# Altium PCB radioslave.PcbDoc
Units mil, origin at the board's own origin, x right, y up, seen from the top; angles counter-clockwise.
Board outline 1771.65 x 3937.01 mil, 2 copper layers (Top Layer, Bottom Layer); 44 components, 40 nets, 148 pads, 22 vias.
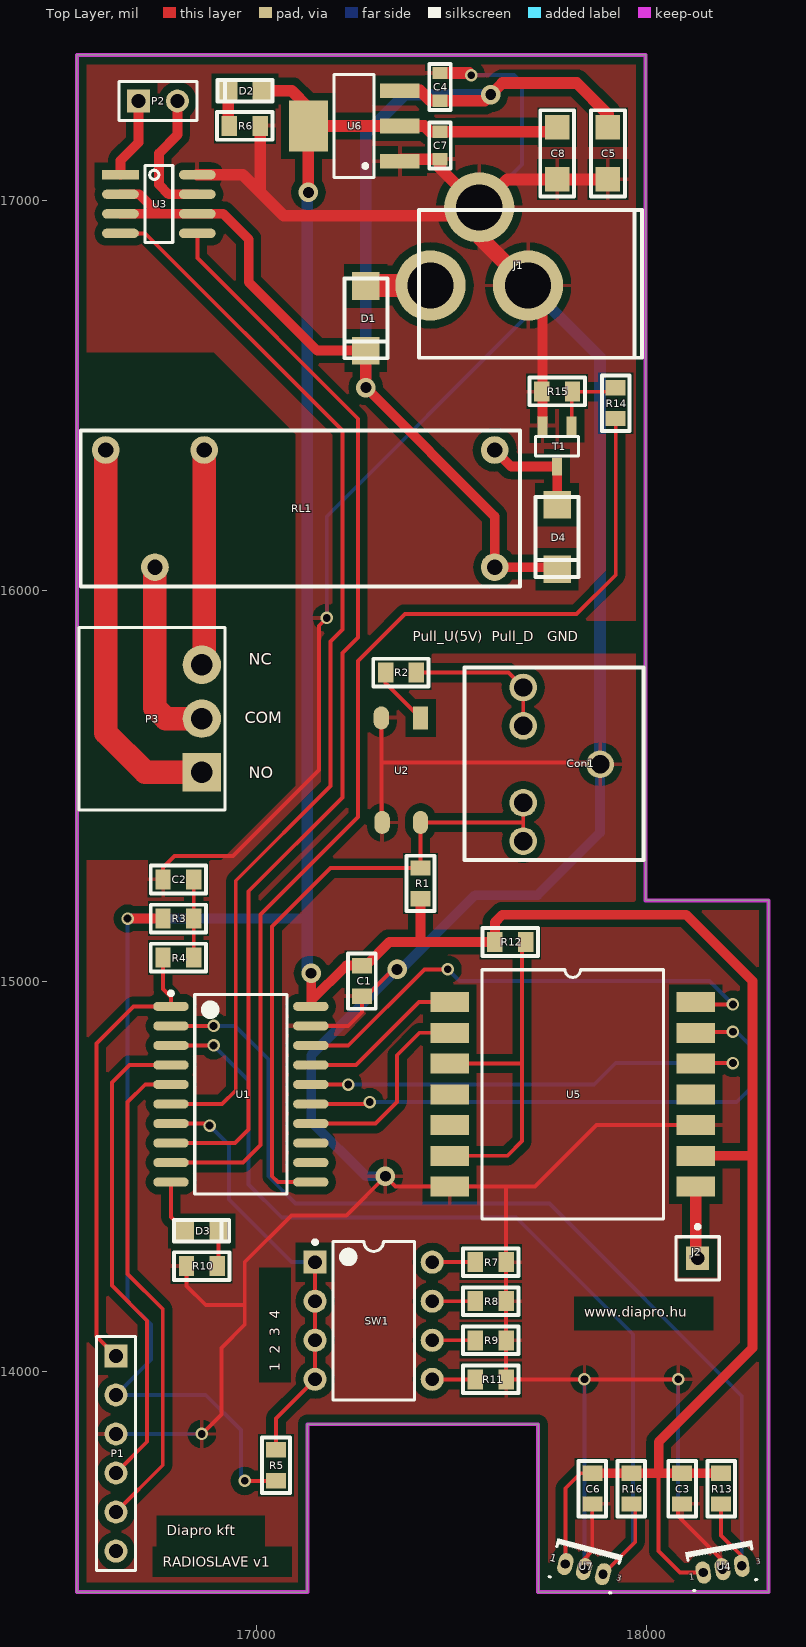
[diagram p0: Top Layer view]
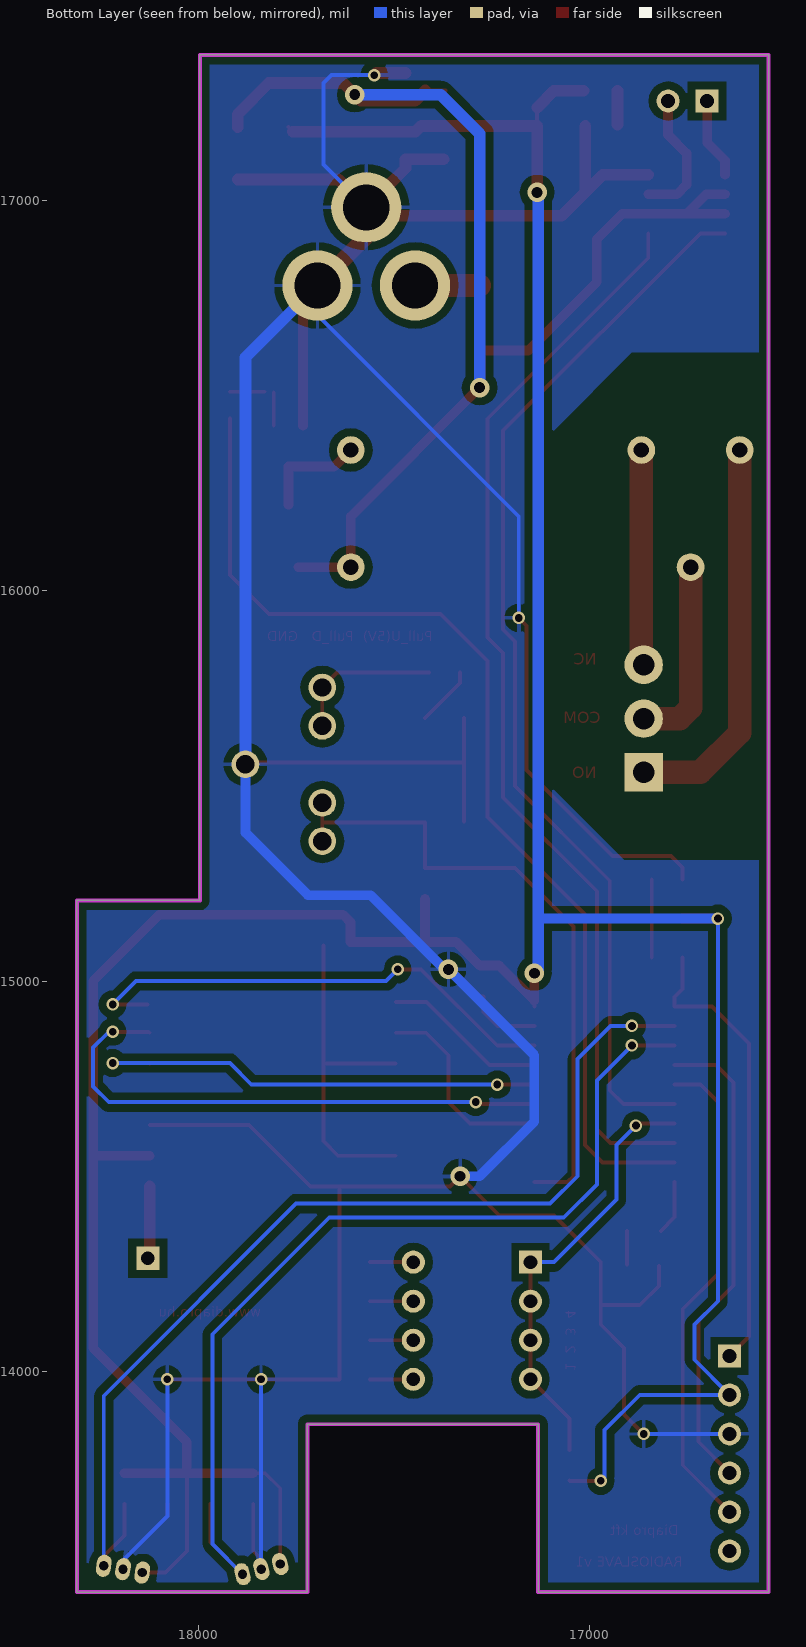
[diagram p1: Bottom Layer view, seen from below]
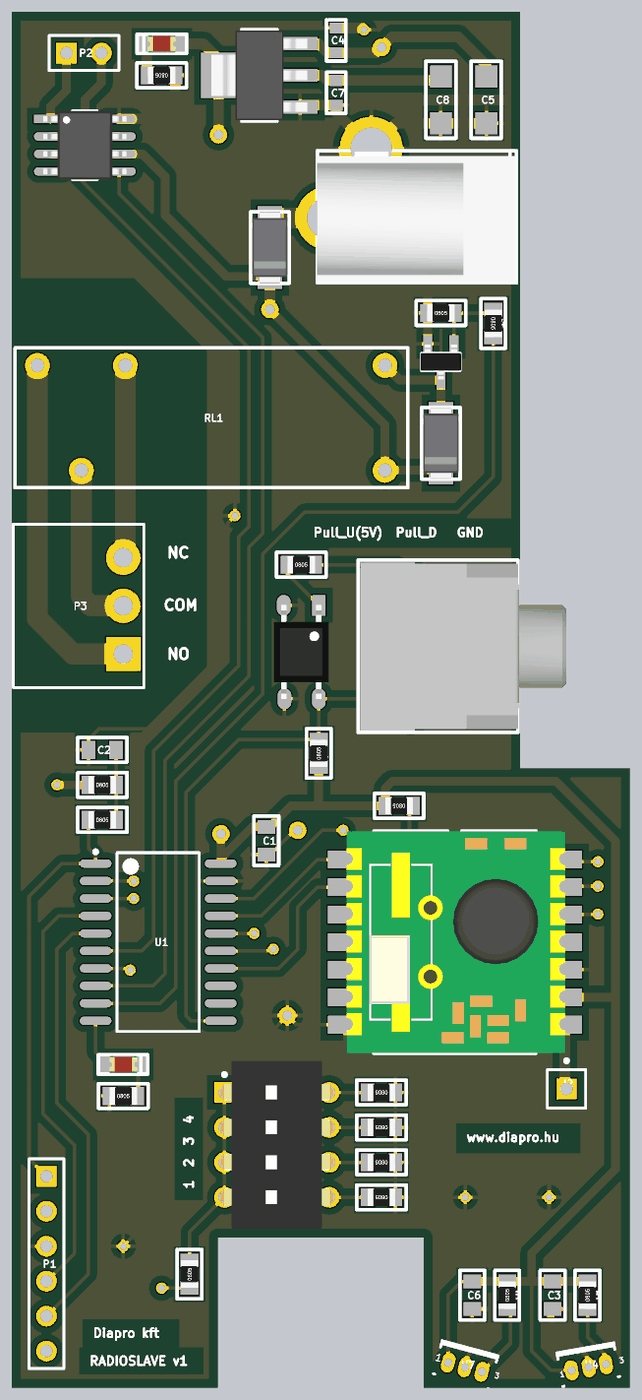
[diagram p2: 3D render of the assembled board from above, using the file's embedded part models]

## Layer stack, top to bottom
Top Layer: signal copper 1.4
Dielectric: dielectric 12.6, FR-4, Dk 4.8
Bottom Layer: signal copper 1.4

## Board outline
16540,13435 16540,17372.01 17996.69,17372.01 17996.69,15206.65 18311.65,15206.65 18311.65,13435 17721.1,13435 17721.1,13865 17130.55,13865 17130.55,13435

## Design rules (kind name [scope] priority, off if disabled: settings)
Clearance Clearance_to_polygon [All vs (InNamedPolygon('Bottom GND'))  or (InNamedPolygon('Top GND'))] p1: gap=20
Clearance [All] p2: gap=15
PolygonConnect [All] p1: connectstyle=Relief reliefconductorwidth=10 reliefentries=4 polygonreliefangle="90 Angle"
RoutingVias [All] p1: holewidth=20 width=32 viastyle="Through Hole" minholewidth=20 minwidth=32 maxholewidth=28 maxwidth=50
SilkToSilkClearance [All] p1: silktosilkclearance=0
SilkscreenOverComponentPads [All] p1: minsilkscreentomaskgap=0
SolderMaskExpansion [All] p1: expansion=4
Width [All] p1: maxlimit=60 minlimit=10 preferedwidth=10
26 further rules are at their usual default settings.

## Components (designator, comment, footprint, x,y, rotation, side; value= is the part's Value field where it differs from the comment)
C1 "100nF" FP_0805_CAP_060 17270,15000 r90 top
C2 "100nF" FP_0805_CAP_060 16800,15260 r0 top
C3 "100nF" FP_0805_CAP_060 18090,13700 r90 top
C4 "100nF" FP_0603_CAP_080 17470,17290 r270 top
C5 "10uF" FP_1206_CAP_085 17900,17120 r270 top
C6 "100nF" FP_0805_CAP_060 17860,13700 r90 top
C7 "100nF" FP_0603_CAP_080 17470,17140 r270 top
C8 "10uF" FP_1206_CAP_085 17770,17120 r90 top
Con1 "Stereo_Jack" STEREO_JACK 17880,15555 r180 top
D1 "DIODE_big" "FP_SMA DO214AC" 17280,16780 r270 top
D2 "LED_RED" FP_0805_LED_RED 17010,17280 r180 top
D3 "LED_GREEN" FP_0805_LED_RED 16820,14360 r0 top
D4 "DIODE_big" "FP_SMA DO214AC" 17770,16220 r270 top
J1 "2.xmm" FP_DC_TAP_ANYA 17445.51,16781.46 r270 top
J2 "ANT" PIN1 18130,14290 r0 top
P1 "Header 6" HDR1X6 16640,14040 r270 top
P2 "Header 2" HDR1X2 16697.48,17253.9 r0 top
P3 "Header 3" "SORKAPOCS 3 P RM3.81" 16860,15810 r270 top
R1 "10k" FP_0805_RES 17420,15250 r90 top
R2 "470R" FP_0805_RES 17370,15790 r0 top
R3 "10K" FP_0805_RES 16800,15160 r0 top
R4 "100R" FP_0805_RES 16800,15060 r0 top
R5 "10k" FP_0805_RES 17050,13760 r90 top
R6 "270R" FP_0805_RES 16970,17190 r180 top
R7 "10k" FP_0805_RES 17600,14280 r180 top
R8 "10k" FP_0805_RES 17600,14180 r180 top
R9 "10k" FP_0805_RES 17600,14080 r180 top
R10 "270R" FP_0805_RES 16860,14270 r0 top
R11 "10k" FP_0805_RES 17600,13980 r180 top
R12 "10k" FP_0805_RES 17650,15100 r180 top
R13 "820R" FP_0805_RES 18190,13700 r90 top
R14 "470R" FP_0805_RES 17920,16480 r270 top
R15 "10k" FP_0805_RES 17770,16510 r0 top
R16 "820R" FP_0805_RES 17960,13700 r90 top
RL1 "S7001E12W" RELAY_MORSE 17610,16360 r180 top
SW1 "DIPSW4" "DIP switch 4 TH" 17300,14130 r0 top
T1 "Si2306" FET_SOT23 17770,16370 r90 top
U1 "PIC24F16KA101-I/SO" SOIC-SO20_N 16960,14710 r0 top
U2 "KB817D-B" SOP-4 17370,15540 r270 top
U3 "BD6221" DIGITAL_SOIC8 16750,16990 r0 top
U4 "A3122EUA" "Allegro_hall sensor" 18193.54,13493.74 r10 top
U5 "RFM12B" RFM12B-S1 17810,14710 r0 top
U6 "LD1117xx" SUPPLY_SOT223 17250,17190 r180 top
U7 "A3122EUA" "Allegro_hall sensor" 17839.21,13493.74 r345 top

## Footprints (in the part's own frame and the unit in brackets; to place one, negate y for a bottom-side part, rotate by r counter-clockwise, add the part's x,y. Pads: shape width x height; smd on the part's side, far side on the other; paste and mask are expansions set on the pad)
"Allegro_hall sensor" [mm] "SIP; 3 Leads; Body 3 x 4 x 1.5 mm (typ); Pitch 1.27 mm"
  oval 0.95x1.45 hole 0.6: 1(-1.27,0) 2(0,0) 3(1.27,0)
  silkscreen extent -2.2,-1.05 2.2,1.53
DIGITAL_SOIC8 [mm]
  rect 2.4x0.6 smd: 1(-2.5,1.905)
  oval 2.4x0.6 smd: 2(-2.5,0.635) 3(-2.5,-0.635) 4(-2.5,-1.905) 5(2.5,-1.905) 6(2.5,-0.635) 7(2.5,0.635) 8(2.5,1.905)
  silkscreen extent -0.9,-2.5 0.9,2.5, body extent -3.03,-2.5 3.03,2.5, height 1.9
"DIP switch 4 TH" [mm]
  rect 1.5x1.5 hole 0.9: 1(-3.81,3.81)
  round 1.5 hole 0.9: 2(-3.81,1.27) 3(-3.81,-1.27) 4(-3.81,-3.81) 5(3.81,-3.81) 6(3.81,-1.27) 7(3.81,1.27) 8(3.81,3.81)
  silkscreen extent -3.93,-5.15 2.65,5.23, body extent -4.1,-6.1 4.1,6.1, height 5
FET_SOT23 [mm] "SOT23-3 tok"
  rect 1.2x0.65 smd: D(-1.327,0) G(1.327,-0.95) S(1.327,0.95)
  silkscreen extent -0.64,-1.4 0.64,1.4, body extent -1.27,-1.46 1.27,1.46, height 0.97
FP_0603_CAP_080 [mm] "0.8mm magas 0603 kapacitás"
  rect 0.8x0.95 smd: 1(-0.9,0) 2(0.9,0)
  silkscreen extent -1.5,-0.7 1.5,0.7, body extent -0.8,-0.4 0.76,0.4, height 0.8
FP_0805_CAP_060 [mm] "0805 kapacitás YAGEO 0.6 mm magas"
  rect 1x1.3 smd: 1(-1,0) 2(1,0)
  silkscreen extent -1.8,-0.9 1.8,0.9, body extent -1,-0.64 1.03,0.64, height 0.6
FP_0805_LED_RED [mm] "0805 méretû piros LED"
  rect 1.2x1.3 smd: A(-0.1,0) K(2.1,0)
  silkscreen extent -0.8,-0.7 2.8,0.7, body extent 0.01,-0.63 2.03,0.62, height 1.1
FP_0805_RES [mm] "0805 ellenállás"
  rect 1x1.3 smd: 1(-1,0) 2(1,0)
  silkscreen extent -1.8,-0.9 1.8,0.9, body extent -1,-0.62 1,0.63, height 0.62
FP_1206_CAP_085 [mm] "1206 kapacitás 0.85 mm"
  rect 1.6x1.6 smd: 1(-1.7,0) 2(1.7,0)
  silkscreen extent -2.8,-1.1 2.8,1.1, body extent -1.52,-0.79 1.58,0.79, height 0.85
FP_DC_TAP_ANYA [mil] "DC HEBA25 TÁPFESZÜLTSÉG ALJZAT ZÁRT, NYÁKBA 90°"
  round 180 hole 118: 1(0,0) 2(0,250) 3(-200,125)
  silkscreen extent -193,-30 185,541, body extent -190,-31 183,539, height 440
"FP_SMA DO214AC" [mm] "SMA DO-214AC tok"
  rect 1.8x1.8 smd: A(0,0) K(4.2,0)
  silkscreen extent -0.5,-1.4 4.7,1.4, body extent -0.5,-1.3 4.7,1.3, height 2.42
HDR1X2 [mm] "Connector; Header; 2 Position"
  rect 1.5x1.5 hole 0.9: 1(0,0)
  round 1.5 hole 0.9: 2(2.54,0)
  silkscreen extent -1.27,-1.27 3.81,1.27
HDR1X6 [mm] "Connector; Header; 6 Position"
  rect 1.5x1.5 hole 0.9: 1(0,0)
  round 1.5 hole 0.9: 2(2.54,0) 3(5.08,0) 4(7.62,0) 5(10.16,0) 6(12.7,0)
  silkscreen extent -1.27,-1.27 13.97,1.27
PIN1 [mm] "Connector; Plug"
  rect 1.5x1.5 hole 0.9: 1(0,0)
  silkscreen extent -1.4,-1.4 1.4,2.17
RELAY_MORSE [mm]
  round 1.8 hole 1: 1(0,7.62) 2(0,0) 3(18.9,0) 4(22.1,7.62) 5(25.3,0)
  silkscreen extent -1.65,-1.27 26.92,8.89, body extent -1.65,-1.27 26.92,8.89, height 12.5
RFM12B-S1 [mm]
  rect 2.5x1.3 smd: 1(-8,6) 2(-8,4) 3(-8,2) 4(-8,0) 5(-8,-2) 6(-8,-4) 7(-8,-6) 8(8,-6) 9(8,-4) 10(8,-2) 11(8,0) 12(8,2) 13(8,4) 14(8,6)
  silkscreen extent -5.91,-8.1 5.92,8.1, body extent -7.88,-8.05 8.04,8.05, height 2.1
SOIC-SO20_N [mm] "SOIC, 20-Leads, Body 12.8x7.5mm, Pitch 1.27mm, IPC Medium Density"
  oval 2.3x0.6 smd: 1(-4.55,5.715) 2(-4.55,4.445) 3(-4.55,3.175) 4(-4.55,1.905) 5(-4.55,0.635) 6(-4.55,-0.635) 7(-4.55,-1.905) 8(-4.55,-3.175) 9(-4.55,-4.445) 10(-4.55,-5.715) 11(4.55,-5.715) 12(4.55,-4.445) 13(4.55,-3.175) 14(4.55,-1.905) 15(4.55,-0.635) 16(4.55,0.635) 17(4.55,1.905) 18(4.55,3.175) 19(4.55,4.445) 20(4.55,5.715)
  silkscreen extent -4.67,-6.5 3,6.69, body extent -3.75,-6.5 3.75,6.5, height 2.65
SOP-4 [mm]
  rect 1.5x1 smd: 1(-3.4,1.275)
  oval 1.5x1 smd: 2(-3.4,-1.275) 3(3.4,-1.225) 4(3.4,1.275)
  body extent -3.43,-2 3.43,2, height 2.02
"SORKAPOCS 3 P RM3.81" [mm] "SORKAPOCS 3 P RM3.81 CSAPSORLÉC TLPHC100V-03P (TLM) ZÁRT 8A 150V VDE [43-22-68]"
  rect 2.5x2.5 hole 1.4: 1(7,0)
  round 2.5 hole 1.4 mask+0.102: 2(3.5,0) 3(0,0)
  silkscreen extent -2.44,-8 9.45,1.5, body extent -2.41,-8 9.45,1.5, height 7.2
STEREO_JACK [mm] "JACK 3.5mm ANYA 90° JS35-09 (T-T) LEVÁL. NYÁK SZTEREO 90° A-V [43-08-39]"
  round 1.8 hole 1.2: 1(0,0) 2(5,5) 2(5,2.5) 3(5,-2.5) 3(5,-5)
  silkscreen extent -2.82,-6.3 8.81,6.22, body extent -6.33,-6.13 8.67,6.07, height 11.5
SUPPLY_SOT223 [mm] "SOT223 package, 3 leads"
  rect 2.55x0.95 smd: 1(-2.975,2.3) 2(-2.975,0) 3(-2.975,-2.3)
  rect 2.55x3.3 smd: 2(2.975,0)
  silkscreen extent -1.3,-3.35 1.3,3.35, body extent -3.5,-3.25 3.5,3.25, height 1.65

## Part data
C1 C2 C3 C4 C5 C6 C7 C8: library part Cap, "Capacitor"
D2: library part LED_R, "Typical LED"
D3: library part LED_G, "Typical LED"
J1: library part DC_TAP_ANYA, "2.xmm DC HEBA25 TÁPFESZÜLTSÉG ALJZAT ZÁRT, NYÁKBA 90°"
J2: library part Socket, "Socket"
P1: "Header, 6-Pin"
P2: "Header, 2-Pin"
P3: "Header, 3-Pin"
R1 R2 R3 R4 R5 R6 R7 R8 R9 R10 R11 R12 R13 R14 R15 R16: library part Res3, "Resistor"
RL1: library part RELAY_MORSE, "S7001E12W  12V morse 230AC/10A"
T1: library part NMOS
U1: "16-Bit Flash Microcontroller with nanoWatt XLP Technology, 16KB Flash, 1.5KB SRAM, 20-Pin SOIC, Industrial Temperature"
U2: "KB817D-B (KIN) SOP-4L OPTOCOUPLER TRANS-OUT 300-600% 5kV SOP-4L [84-00-48]"
U3: "H_bridge"
U4 U7: "Hall-Effect Switch for High-Temperature Operation"
U5: "FM Module"
U6: "LD1117xx 3,3V lin reg"

## Via types
v1: diameter 32, hole 20, Top Layer to Bottom Layer, 16 vias
v2: diameter 50, hole 28, Top Layer to Bottom Layer, 6 vias

## Nets (pads, with @x,y where several pads share a name; then routed paths per layer and width w, separated by ;. In a path a pad name is that pad's centre, name@x,y a point inside that pad or via, vN(x,y) a via of type N, cw(c..) or ccw(c..) an arc to the next point about the centre after c; other vN are vias at no path point)
AN0: R13.1 U1.2 U4.3 | length 2645.1
  Top Layer w10: U1.2 v1(16890,14885) ; R13.1 18190,13580 18242.78,13527.22 U4.3
  Bottom Layer w10: v1(16890,14885) 16945,14885 17030,14800 17030,14500 17100,14430 17750,14430 18242.78,13937.22 U4.3
AN1: R16.1 U1.3 U7.3 | length 2506.3
  Top Layer w10: U1.3 v1(16890,14835) ; U7.3 17970,13563.29 R16.1@17970,13660.63
  Bottom Layer w10: v1(16890,14835) 16980,14745 16980,14479.29 17064.64,14394.64 17665.36,14394.64 17964.64,14095.36 17964.64,13557.94 U7.3
AN2: R5.2 SW1.1 SW1.2 SW1.3 SW1.4 U1.7 | length 1120.2
  Top Layer w10: U1.7 16875,14635 v1(16880,14630) ; R5.2 17050,13880 SW1.4 SW1.3 SW1.2 SW1.1
  Bottom Layer w10: v1(16880,14630) 16930,14580 16930,14440 17090,14280 SW1.1
AN2/PGD1: P1.4 U1.4 | length 1239.9
  Top Layer w10: P1.4 16720,13820 16720,14130 16630,14220 16630,14740 16675,14785 U1.4
GND: C1.1 C2.1 C3.1 C4.1 C5.2 C6.1 C7.2 C8.1 Con1.1 J1.2 J1.3 P1.3 R6.1 R7.1 R8.1 R9.1 R10.1 R11.1 R15.1 T1.S U1.19 U2.2 U2.3 U3.8 U4.2 U5.7 U5.10 U6.1 U7.2 | length 13383
  Top Layer w10: C2.1 16760.63,15290.63 16790,15320 16940,15320 17160,15540 17160,15910 v1(17180,15930) ; R10.1 16820.63,14219.37 16870,14170 16970,14170 ; v1(16860,13840) 16910,13890 16910,14060 16970,14120 16970,14170 ; U1.19 17235,14885 17270,14920 C1.1 17280.63,14960.63 17360,15040 v2@17360,15050 ; U2.3@17319.8,15408.11 17319.8,15560.2 ; U2.2 17319.8,15560.2 ; v1@17544.57,17325.43 v1(17550,17320) ; J1.3@17549.06,16960 J1.3 J1.3@17570.51,16906.46 ; 17639.37,14473.15 R7.1 R8.1 R9.1 R11.1 v1(17840,13980) v1(18080,13980) ; J1.2 J1.2@17732.6,16744.37 ; U7.2 17839.21,13519.21 17860,13540 C6.1 ; Con1.1 17874.8,15560.2 17319.8,15560.2 ; C3.1@18080,13660.63 18080,13630 18193.54,13516.46 U4.2 ; U5.10 17871.26,14631.26 17713.78,14473.78 U5.7 17356.22,14473.78 v2(17330,14500) 17230,14400 17090,14400 16970,14280 16970,14170
  Top Layer w25: T1.S J1.2@17732.6,16744.37
  Top Layer w30: U3.8 16965,17065 17009.37,17020.63 ; R6.1 17009.37,17020.63 ; U6.1@17372.24,17104.57 C7.2 17470,17081.97 J1.3 17642.13,17053.07 C5.2 ; C4.1 v1@17544.57,17325.43 ; J1.3@17549.06,16960 17070,16960 17009.37,17020.63
  Top Layer w40: J1.3@17570.51,16906.46 J1.2
  Bottom Layer w10: P1.3 v1(16860,13840) ; v1(17180,15930) 17180,16190 17695.51,16705.51 J1.2 ; v2@17350,15020 v2@17360,15020 ; v1(17550,17320) 17660,17320 17680,17300 17680,17090.94 J1.3 ; U7.2 17839.21,13519.21 17840,13520 v1(17840,13980) ; v1(18080,13980) 18080,13630 18193.54,13516.46 U4.2
  Bottom Layer w25: v2(17330,14500) 17280,14500 17140,14640 17140,14810 v2@17350,15020 ; v2@17360,15020 17560,15220 17720,15220 17880,15380 Con1.1
  Bottom Layer w30: J1.2 17880,16596.97 Con1.1
  other v2: 17360,15030
GPIO0: Con1.2 R1.2 U1.11 U2.4 | length 1665.7
  Top Layer w10: U1.11 17055,14485 17040,14500 17040,15140 17189.37,15289.37 R1.2 U2.4@17420,15405.94 ; U2.4 17681.93,15406.14 17683.15,15407.36 ; Con1.2@17683.15,15358.15 17683.15,15407.36 ; Con1.2@17683.15,15456.57 17683.15,15407.36
GPIO1: R14.2 U1.9 | length 2743.1
  Top Layer w10: U1.9 16965,14535 17010,14580 17010,15170 17260,15420 17260,15820 17380,15940 17820,15940 17920,16040 R14.2
GPIO2: D3.A U1.10 | length 139.6
  Top Layer w10: U1.10 16780.87,14395.2 D3.A
GPIO3: U1.6 U3.4 | length 2761.2
  Top Layer w10: U3.4 16715,16915 17220,16410 17220,15900 17190,15870 17190,15500 16946.86,15256.86 16946.86,14720 16911.86,14685 U1.6
GPIO4/PGC1: P1.5 U1.5 | length 1266.5
  Top Layer w10: P1.5 16760,13760 16760,14160 16670,14250 16670,14690 16715,14735 U1.5
GPIO5: U1.8 U3.5 | length 2795.1
  Top Layer w10: U1.8 16945,14585 16980,14620 16980,15230 17220,15470 17220,15840 17260,15880 17260,16440 16848.43,16851.57 U3.5
M\C\L\R\: P1.1 R4.1 U1.1 | length 1184.3
  Top Layer w10: P1.1 16590,14090 16590,14840 16685,14935 U1.1 16780.87,14959.13 16760.63,14979.37 R4.1
MISO: U1.17 U5.1 | length 422.7
  Top Layer w10: U1.17 17255,14785 17416.22,14946.22 U5.1
MOSI: U1.16 U5.12 | length 1199.2
  Top Layer w10: U1.16 v1(17235,14735) ; U5.12 18126.22,14790 v1(18220,14790)
  Bottom Layer w10: v1(17235,14735) 17865,14735 17920,14790 v1(18220,14790)
NetC2_2: C2.2 R3.2 R4.2 | length 200
  Top Layer w10: R4.2 R3.2 C2.2
NetCon1_3: Con1.3 R2.2 | length 388
  Top Layer w10: R2.2 17645,15790 17683.15,15751.85 Con1.3@17683.15,15653.43
NetD1_A: D1.A J1.1 | length 164.1
  Top Layer w60: D1.A@17281.46,16781.46 J1.1
NetD2_K: D2.K R6.2 | length 86.7
  Top Layer w30: R6.2@16927.32,17193.31 D2.K
NetD3_K: D3.K R10.2 | length 86.7
  Top Layer w10: R10.2@16902.68,14273.31 D3.K
NetD4_A: D4.A RL1.2 T1.D | length 275.3
  Top Layer w25: RL1.2 17652.24,16317.76 T1.D D4.A
NetJ2_1: J2.1 U5.8 | length 185.9
  Top Layer w10: J2.1@18124.96,14295.04 J2.1
  Top Layer w30: J2.1@18124.96,14295.04 U5.8
NetP2_1: P2.1 U3.1 | length 207.9
  Top Layer w25: U3.1 16651.57,17101.57 16697.48,17147.48 P2.1
NetP2_2: P2.2 U3.7 | length 342.3
  Top Layer w25: P2.2 16797.48,17167.48 16750,17120 16750,17040 16775,17015 U3.7
NetP3_1: P3.1 RL1.5 | length 1012.1
  Top Layer w60: RL1.5 16613.94,15636.06 16715.59,15534.41 P3.1
NetP3_2: P3.2 RL1.4 | length 491.5
  Top Layer w60: RL1.4 16739.92,15700.08 16767.8,15672.2 P3.2
NetP3_3: P3.3 RL1.3 | length 544.1
  Top Layer w60: P3.3@16865.91,15815.91 RL1.3
NetR2_1: R2.1 U2.1 | length 153.2
  Top Layer w10: R2.1 17330.63,15763.43 U2.1
NetR7_2: R7.2 SW1.8 | length 110.6
  Top Layer w10: SW1.8 R7.2
NetR8_2: R8.2 SW1.7 | length 110.6
  Top Layer w10: SW1.7 R8.2
NetR9_2: R9.2 SW1.6 | length 110.6
  Top Layer w10: SW1.6 R9.2
NetR11_2: R11.2 SW1.5 | length 110.6
  Top Layer w10: SW1.5 R11.2
NetR12_1: R12.1 U5.3 U5.6 | length 886.1
  Top Layer w10: U5.6 17642.52,14552.52 17680,14590 R12.1@17680,15090.63 ; U5.3 17680,14788.74
NetR14_1: R14.1 R15.2 T1.G | length 175.2
  Top Layer w10: T1.G R15.2@17807.4,16508.03 ; 17830.63,16509.37 R14.1@17920,16509.37
"RF I\R\Q\": U1.14 U5.2 | length 522.5
  Top Layer w10: U1.14 17305,14635 17360,14690 17360,14810 17417.48,14867.48 U5.2
"RF S\S\": U1.18 U5.14 | length 1287.7
  Top Layer w10: U1.18 17235,14835 17430,15030 v1(17490,15030) ; U5.14@18131.18,14940 v1(18220,14940)
  Bottom Layer w10: v1(17490,15030) 17520,15000 18160,15000 v1(18220,14940)
SCK: U1.15 U5.13 | length 1422.2
  Top Layer w10: U1.15 17295,14685 v1(17290,14690) ; U5.13 18127.48,14870 v1@18230,14870
  Bottom Layer w10: v1(17290,14690) 18230,14690 18270,14730 18270,14830 v1@18230,14870
  other v1: 18220,14870
SCL: U1.12
SDA: U1.13
VCC3.3V: C1.2 C3.2 C6.2 C7.1 C8.2 D2.A P1.2 R1.1 R3.1 R5.1 R12.2 R13.2 R16.2 U1.20 U4.1 U5.9 U6.2 U7.1 | length 9385
  Top Layer w10: v1(16970,13720) 17049.37,13720 R5.1 ; U6.2@17132.87,17190 U6.2@17132.87,17237.13 ; U1.20 17140,14935.87 17140,14950 ; C8.2@17758.5,17175.43 C8.2 ; U7.1 17790.92,13700.92 17829.37,13739.37 C6.2 ; 18030,13739.37 18030,13540 18084.94,13485.06 U4.1 U4.1@18150,13479.36
  Top Layer w25: v1(16670,15160) R3.1 ; v2(17140,15020) 17140,14950 17230,15040 17280,15040 17340,15100 17420,15100 ; R1.1 17420,15100 ; C6.2 R16.2 18030,13739.37 ; U5.9 18267.48,14552.52 ; R13.2 C3.2 18030,13739.37 ; 17420,15100 R12.2 17610.63,15150.63 17630,15170 18100,15170 18270,15000 18270,14060 18030,13820 18030,13739.37
  Top Layer w30: D2.A 17090,17280 U6.2@17132.87,17237.13 ; v2(17132.87,17020) 17132.87,17190 17367.13,17190 17430,17190 17444.57,17175.43 C7.1 C8.2@17758.5,17175.43
  Bottom Layer w10: v1(16670,15160) 16670,14180 16730,14120 16730,14030 P1.2 16870,13940 16960,13850 16960,13730 v1(16970,13720) ; v2@17130,15030 v2(17140,15020) ; v2@17130,17017.13 v2(17132.87,17020)
  Bottom Layer w25: v1(16670,15160) 17130,15160
  Bottom Layer w30: v2@17130,15030 17130,15160 v2@17130,17017.13
VCC_13V: C4.2 C5.1 D1.K D4.K RL1.1 U3.2 U3.3 U3.6 U6.3 | length 3423.2
  Top Layer w10: U6.3 17419.45,17280.55 ; v2@17584.57,17254.57 v2(17600,17270)
  Top Layer w25: U3.3 16750,16965 ; U3.2 16700,17015 16750,16965 ; v2(17280,16520) 17610,16190 RL1.1 D4.K@17744.65,16060 ; D1.K 17155.35,16614.65 16980,16790 16980,16900 16915,16965 U3.6 16750,16965
  Top Layer w30: v2(17280,16520) D1.K ; 17419.45,17280.55 17445.43,17254.57 C4.2 v2@17584.57,17254.57 ; v2(17600,17270) 17630,17300 17820,17300 17900,17220 C5.1
  Bottom Layer w30: v2(17280,16520) 17280,17170 17380,17270 v2(17600,17270)
pads on no net: P1.6 U5.4 U5.5 U5.11

## Polygon pours and split planes (outlines as drawn)
GND on Top Layer "Top GND" (solid, pour order 4): 17996.69,17372.01 17996.69,15206.65 18311.65,15206.65 18311.65,13435 17721.1,13435 17721.1,13865 17130.55,13865 17130.55,13435 16540,13435 16540,17372.01
GND on Bottom Layer "Bottom GND" (solid, pour order 5): 17996.69,17372.01 17996.69,15206.65 18311.65,15206.65 18311.65,13435 17721.1,13435 17721.1,13865 17130.55,13865 17130.55,13435 16540,13435 16540,17372.01

## Keep-outs
Keep-Out Layer:
  lines w10: 16540,13435 17130.55,13435 17130.55,13865 17721.1,13865 17721.1,13435 18311.65,13435 18311.65,15206.65 18082.72,15206.65 17996.69,15206.65 17996.69,15324.76 17996.69,17372.01 17165.24,17372.01 16540,17372.01 16540,13435

## Other copper
Top Layer:
  pour cut-out: 16540,16610 16890,16610 17100,16400 17100,15500 16910,15310 16540,15310
  text "Pull_U(5V)  Pull_D   GND" at 17400,15870 h25
  text "NC" at 16980,15810 h30
  text "COM" at 16970,15660 h30
  text "NO" at 16980,15520 h30
  text "www.diapro.hu" at 17840,14140 h25
  text "1  2  3  4" at 17060,14000 h25 r90
  text "Diapro kft" at 16770,13580 h25
  text "RADIOSLAVE v1" at 16760,13500 h25
Bottom Layer:
  pour cut-out: 16540,16610 16890,16610 17100,16400 17100,15500 16910,15310 16540,15310

## Silkscreen, mask and mechanical layers (free items; w line width, h text height)
Top Overlay:
  text "Pull_U(5V)  Pull_D   GND" at 17400,15870 h25
  text "NC" at 16980,15810 h30
  text "COM" at 16970,15660 h30
  text "NO" at 16980,15520 h30
  text "www.diapro.hu" at 17840,14140 h25
  text "1  2  3  4" at 17060,14000 h25 r90
  text "Diapro kft" at 16770,13580 h25
  text "RADIOSLAVE v1" at 16760,13500 h25

## Text inside footprints (layer, text, board x,y; h text height)
U4: Top Overlay "1" at 18110,13465 h15 r10; Top Overlay "3" at 18280,13505 h15 r10
U7: Top Overlay "1" at 17750,13515 h20 r345; Top Overlay "3" at 17920,13465 h15 r345